# Altium PCB mc_psu_v2.PcbDoc
Units mm, origin at the board's own origin, x right, y up, seen from the top; angles counter-clockwise.
Board outline 90 x 82 mm, 2 copper layers (Top, Bottom); 73 components, 30 nets, 239 pads, 118 vias.
Unrouted connection lines stored in the file: 3.
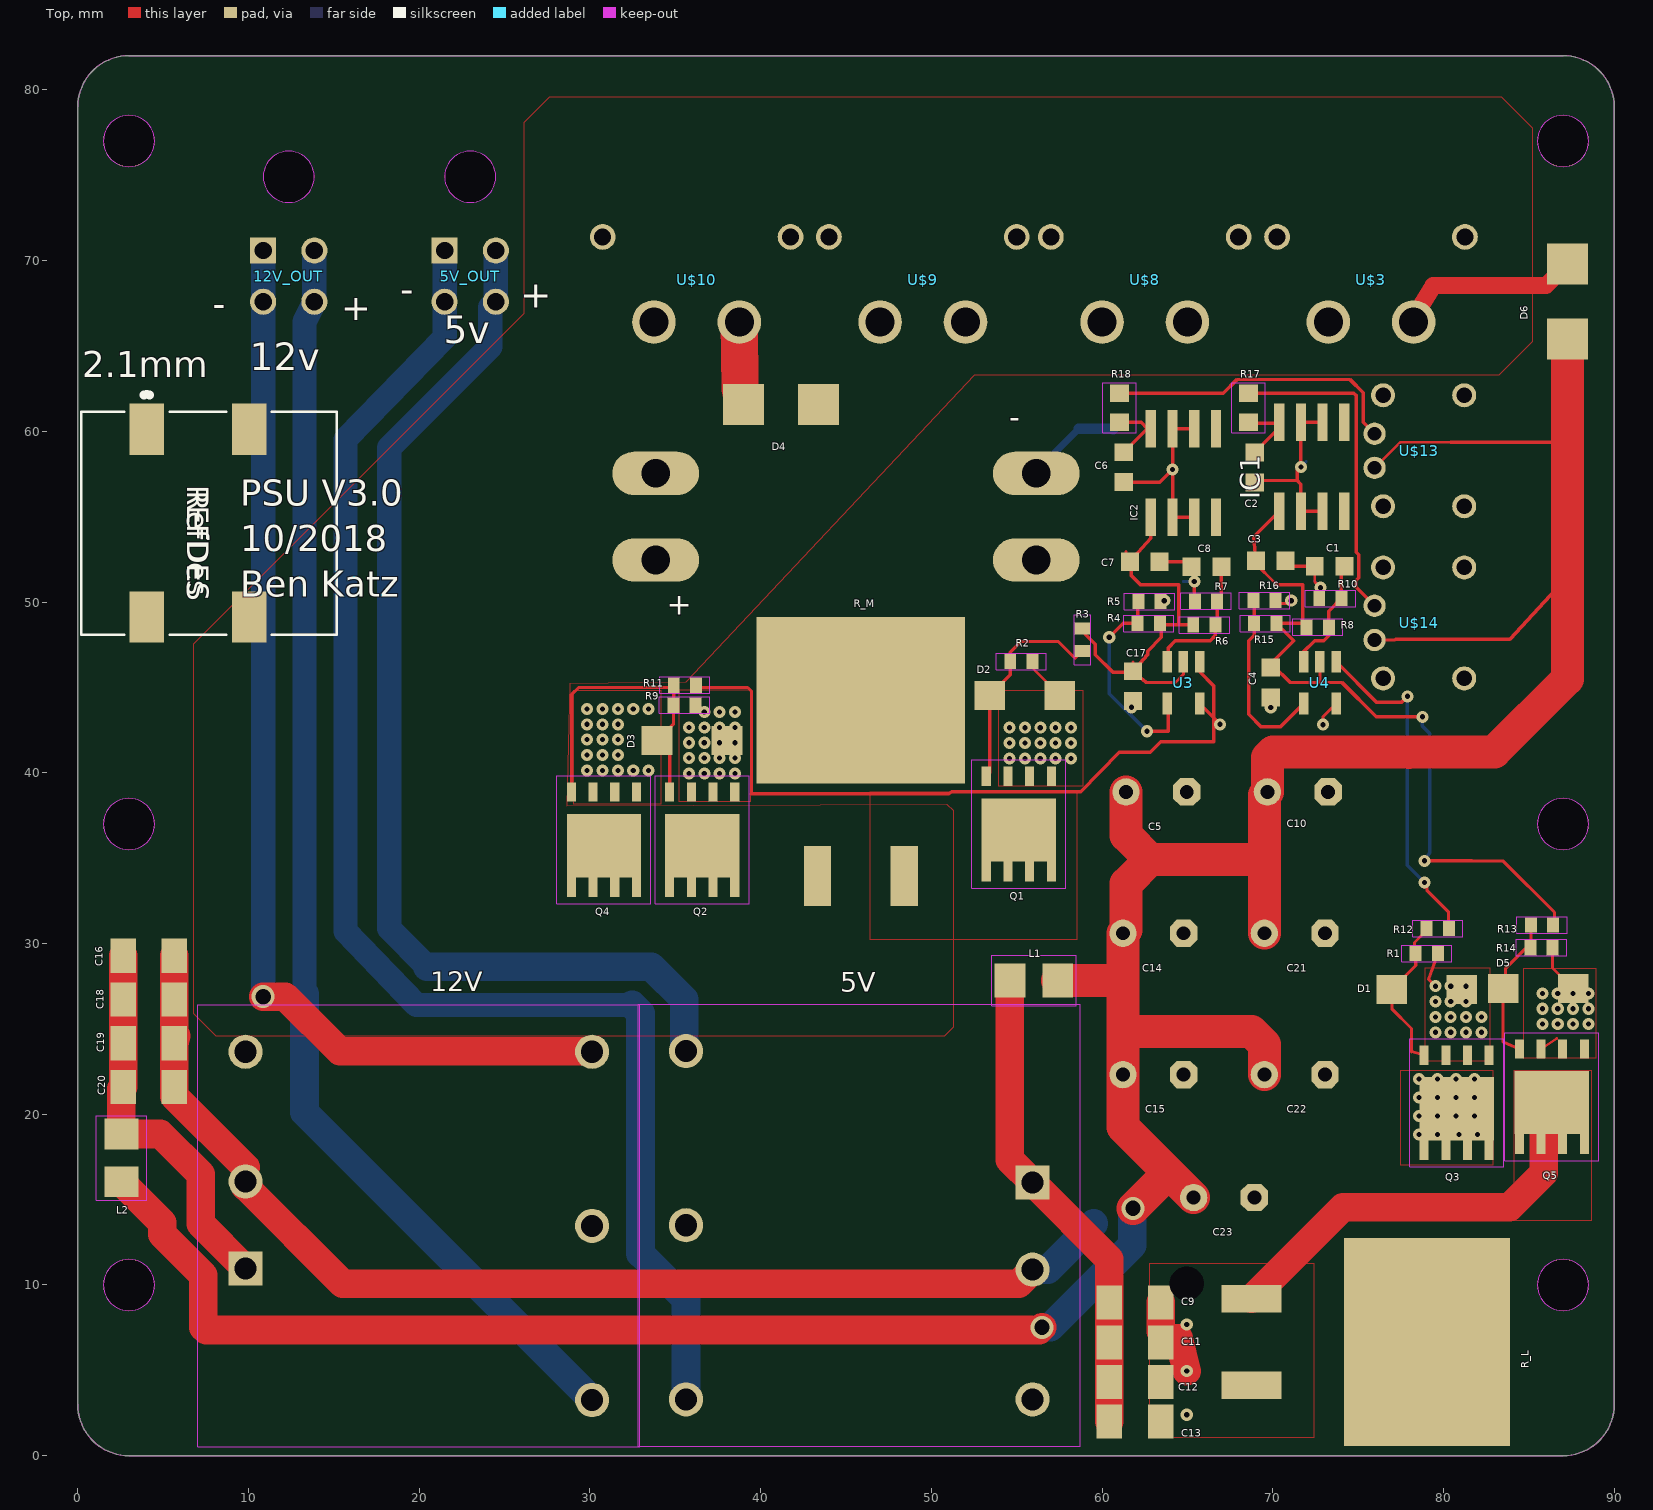
[diagram p0: Top view]
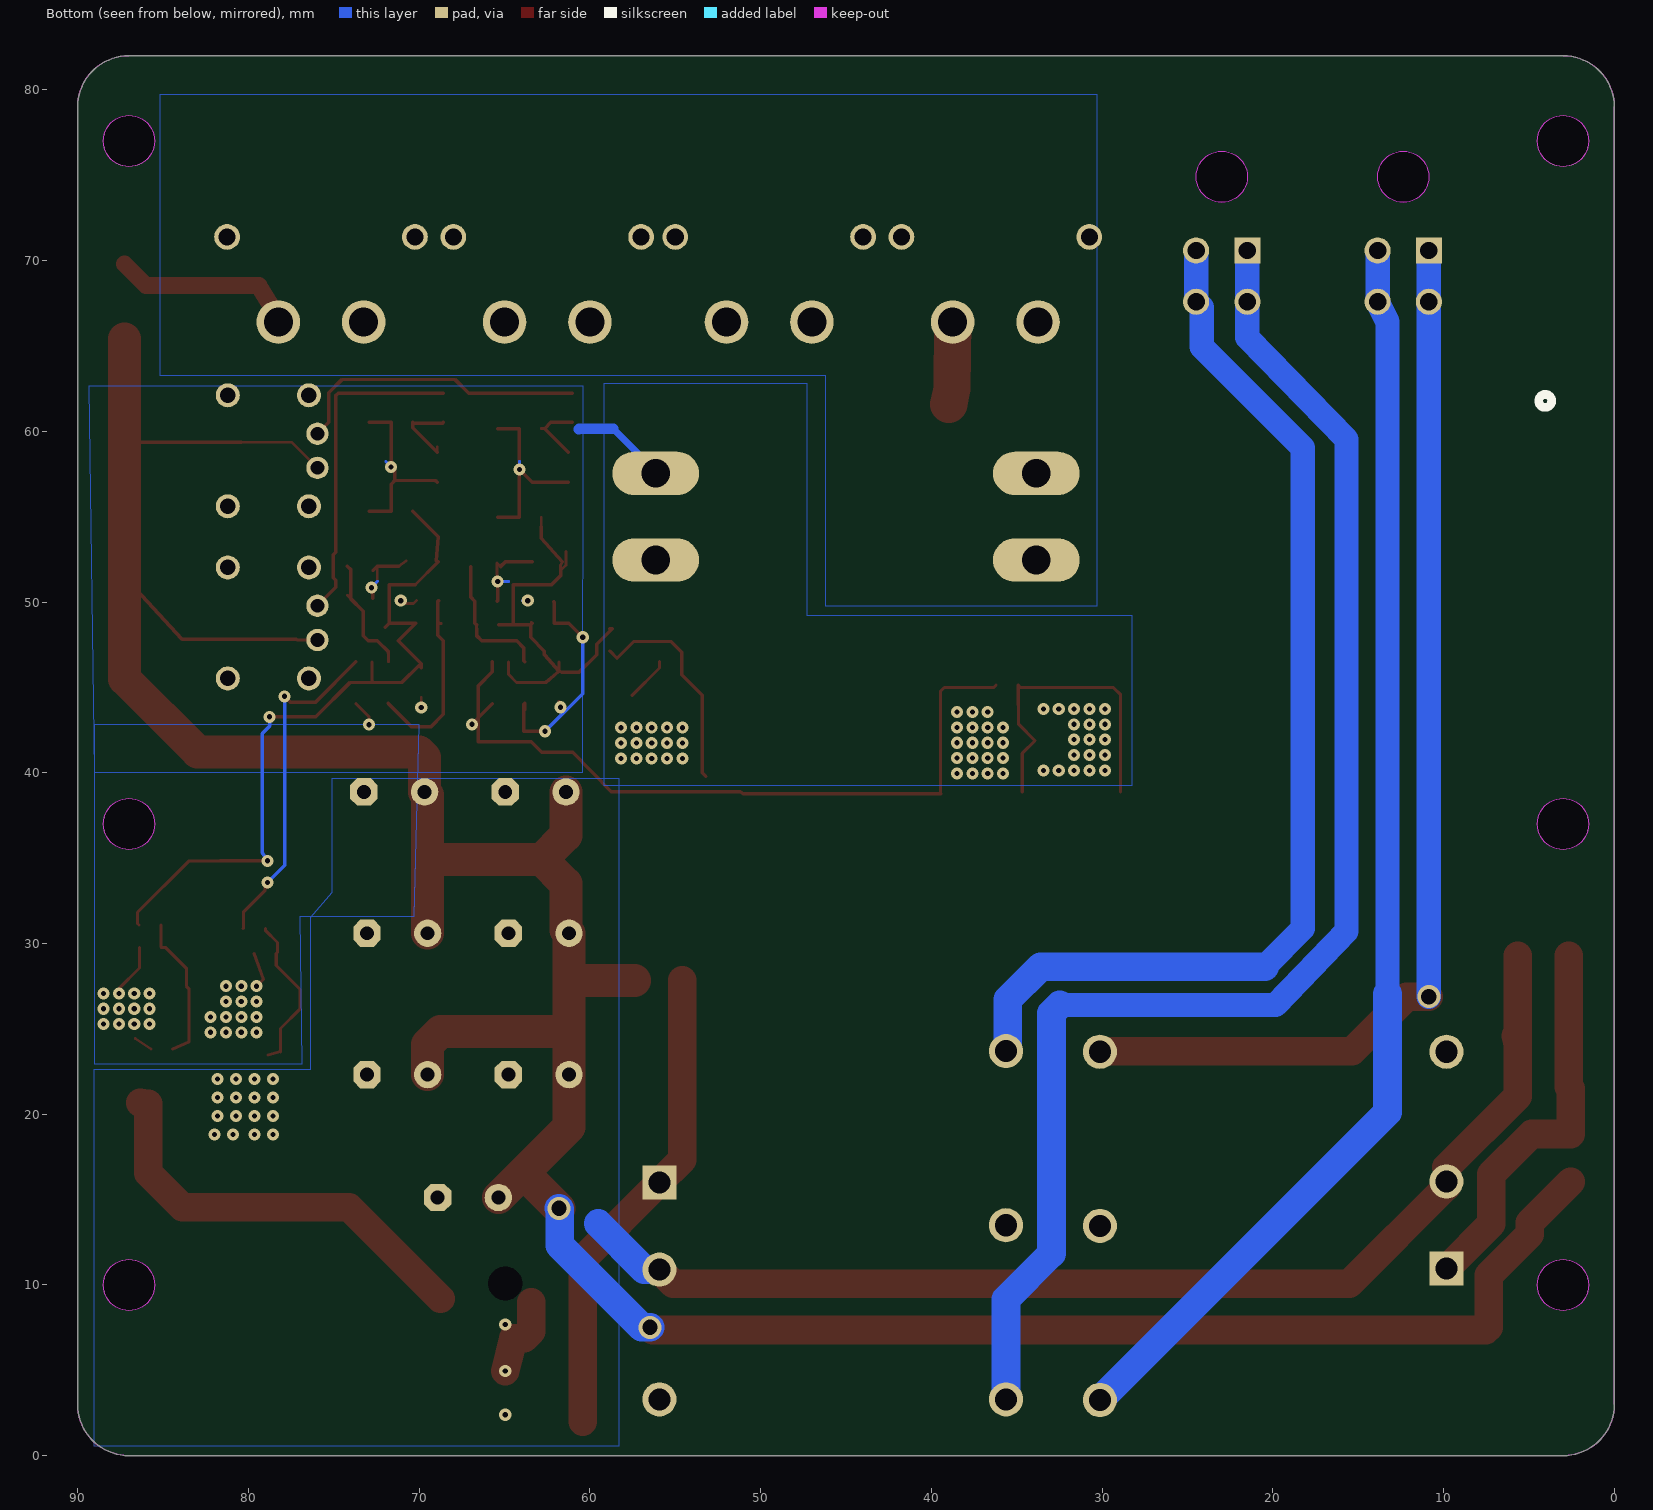
[diagram p1: Bottom view, seen from below]

## Layer stack, top to bottom
Top Solder: solder mask 0.0102, Solder Resist, Dk 3.5
Top: signal copper 0.035
Dielectric 1: dielectric 0.32, FR-4, Dk 4.8
Bottom: signal copper 0.035
Bottom Solder: solder mask 0.0102, Solder Resist, Dk 3.5

## Board outline
90,3 90,79 ccw(c87,79) 87,82 3,82 ccw(c3,79) 0,79 0,3 ccw(c3,3) 3,0 87,0 ccw(c87,3)
cut-out: 87,75.5 ccw(c87,77) 88.5,77 ccw(c87,77) 87,78.5 ccw(c87,77) 85.5,77 ccw(c87,77)
cut-out: 3,75.5 ccw(c3,77) 4.5,77 ccw(c3,77) 3,78.5 ccw(c3,77) 1.5,77 ccw(c3,77)
cut-out: 22.99,73.41 ccw(c22.99,74.91) 24.49,74.91 ccw(c22.99,74.91) 22.99,76.41 ccw(c22.99,74.91) 21.49,74.91 ccw(c22.99,74.91)
cut-out: 12.36,73.41 ccw(c12.36,74.91) 13.86,74.91 ccw(c12.36,74.91) 12.36,76.41 ccw(c12.36,74.91) 10.86,74.91 ccw(c12.36,74.91)
cut-out: 87,8.5 ccw(c87,10) 88.5,10 ccw(c87,10) 87,11.5 ccw(c87,10) 85.5,10 ccw(c87,10)
cut-out: 3,8.5 ccw(c3,10) 4.5,10 ccw(c3,10) 3,11.5 ccw(c3,10) 1.5,10 ccw(c3,10)
cut-out: 3,35.5 ccw(c3,37) 4.5,37 ccw(c3,37) 3,38.5 ccw(c3,37) 1.5,37 ccw(c3,37)
cut-out: 87,35.5 ccw(c87,37) 88.5,37 ccw(c87,37) 87,38.5 ccw(c87,37) 85.5,37 ccw(c87,37)

## Design rules (kind name [scope] priority, off if disabled: settings)
BoardOutlineClearance mdCopperDimension [All] p1: gap=0.254 ignorepadtopadclearanceinfootprint=FALSE except(0: Arc-SplitContinuation Track-SplitContinuation SMDPad-SplitContinuation THPad-SplitContinuation Via-SplitContinuation Fill-SplitContinuation Poly-SplitContinuation Region-SplitContinuation Text-SplitContinuation; 1.016: Poly-OutlineEdge Poly-CavityEdge Poly-CutoutEdge Poly-SplitBarrior)
Clearance Clearance_for_PolygonClass_Isolate_24 [InPolygonClass('Isolate_24') vs IsArc Or IsTrack Or IsPad Or IsVia Or IsFill Or IsRegion Or IsText] p1: gap=0.61 ignorepadtopadclearanceinfootprint=FALSE
Clearance Clearance_for_PolygonClass_Isolate_16 [InPolygonClass('Isolate_16') vs IsArc Or IsTrack Or IsPad Or IsVia Or IsFill Or IsRegion Or IsText] p2: gap=0.406 ignorepadtopadclearanceinfootprint=FALSE
Clearance Clearance_for_PolygonClass_Isolate_12 [InPolygonClass('Isolate_12') vs IsArc Or IsTrack Or IsPad Or IsVia Or IsFill Or IsRegion Or IsText] p3: gap=0.305 ignorepadtopadclearanceinfootprint=FALSE
Clearance Clearance_for_PolygonClass_Isolate_10 [InPolygonClass('Isolate_10') vs IsArc Or IsTrack Or IsPad Or IsVia Or IsFill Or IsRegion Or IsText] p4: gap=0.254 ignorepadtopadclearanceinfootprint=FALSE
Clearance "Clearance (Same Net)" [All] p5: gap=0.203 ignorepadtopadclearanceinfootprint=FALSE
Clearance [All] p6: gap=0.203 ignorepadtopadclearanceinfootprint=FALSE
HoleSize [All] p1: absolutevalues=TRUE maxlimit=2540 minlimit=0.3 maxpercent=80.000 minpercent=20.000
HoleToHoleClearance mdDrill [All] p1: gap=0.203 allowstackedmicrovias=TRUE
MinimumSolderMaskSliver [All] p1 off: minsoldermaskwidth=0.254
PasteMaskExpansion Expansion_SMDPaste_OFF [InPadClass('SMDPaste_OFF')] p1: expansion=0
PasteMaskExpansion mlMinCreamFrame [All] p2: expansion=0
PolygonConnect PolygonConnect_For_PolygonThermal_OFF [InPolygonClass('PolygonThermal_OFF')] p1: connectstyle=Direct reliefconductorwidth=0.254 reliefentries=4 polygonreliefangle="90 Angle" airgapwidth=0.254
PolygonConnect ThermalVias [IsVia] p2: connectstyle=Direct reliefconductorwidth=0.254 reliefentries=4 polygonreliefangle="90 Angle" airgapwidth=0.254
PolygonConnect [All] p3: connectstyle=Relief reliefconductorwidth=0.254 reliefentries=4 polygonreliefangle="90 Angle" airgapwidth=0.254
RoutingVias [All] p1: holewidth=0.3 width=0.706 viastyle="Through Hole" minholewidth=0.3 minwidth=0.706 maxholewidth=2.54 maxwidth=2.54
SolderMaskExpansion mlMinStopFrame [All] p1: expansion=0.102 istentingtop=FALSE
Width [All] p1: maxlimit=0.254 minlimit=0.203 preferedwidth=0.203
26 further rules are at their usual default settings.

## Classes and differential pairs
polygon class PolygonThermal_OFF: Polygon_1_Net_BAT+ Polygon_1_Net_BAT- Polygon_1_Net_LP_N Polygon_1_Net_M- Polygon_1_Net_N$1 Polygon_1_Net_N$13 Polygon_2_Net_BAT- Polygon_2_Net_LP_N Polygon_3_Net_BAT- Polygon_3_Net_LP_N Polygon_4_Net_BAT- Polygon_5_Net_BAT- Polygon_6_Net_BAT- Polygon_7_Net_BAT- Polygon_8_Net_BAT-
polygon class Isolate_24: Polygon_1_Net_LP_N Polygon_2_Net_LP_N Polygon_7_Net_BAT- Polygon_8_Net_BAT-
polygon class Isolate_16: Polygon_1_Net_M- Polygon_1_Net_N$1
polygon class Isolate_12: Polygon_6_Net_BAT-
polygon class Isolate_10: Polygon_1_Net_BAT+ Polygon_1_Net_BAT- Polygon_1_Net_N$13 Polygon_2_Net_BAT- Polygon_3_Net_BAT- Polygon_3_Net_LP_N Polygon_4_Net_BAT- Polygon_5_Net_BAT-
pad class SMDPaste_OFF: Q1-EP Q2-EP Q3-EP Q4-EP Q5-EP

## Components (designator, comment, footprint, x,y, rotation, side; value= is the part's Value field where it differs from the comment)
2.1mm "FC68148S" FC68148S_CLF 7.691,54.62 r270 top
5V "5v" CONV_PDQ30-Q24-S5-D 45.78,13.5 r270 top
5V_OUT "HEADER_POS4_?43045-0401" 43045-0400 22.99,74.91 r180 top
12V "12V" CONV_PDQ30-Q24-S5-D 19.98,13.46 r90 top
12V_OUT "HEADER_POS4_?43045-0401" 43045-0400 12.36,74.91 r180 top
+ "QFIT" FASTON 33.85,55 r90 top
- "QFIT" FASTON 56.15,55 r270 top
C1 "10uF" C0603K 73.33,52.1 r180 top
C2 "1uF" C0603K 68.94,57.89 r270 top
C3 "10uF" C0603K 69.88,52.42 r0 top
C4 ".1uF" C0603K 69.88,45.28 r270 top
C5 "220uF" E3,5-8 63.18,38.88 r0 top
C6 "1uF" C0603K 61.27,57.9 r270 top
C7 "10uF" C0603K 62.5,52.37 r0 top
C8 "10uF" C0603K 66.11,52.08 r180 top
C9 "10uF" C1206K 61.93,8.98 r0 top
C10 "220uF" E3,5-8 71.46,38.88 r0 top
C11 "10uF" C1206K 61.93,6.64 r0 top
C12 "10uF" C1206K 61.93,4.32 r0 top
C13 "10uF" C1206K 61.93,2 r0 top
C14 "220uF" E3,5-8 63,30.6 r0 top
C15 "220uF" E3,5-8 63,22.32 r0 top
C16 "10uF" C1206K 4.16,29.28 r0 top
C17 ".1uF" C0603K 61.81,45.07 r270 top
C18 "10uF" C1206K 4.16,26.72 r0 top
C19 "10uF" C1206K 4.16,24.16 r0 top
C20 "10uF" C1206K 4.16,21.6 r0 top
C21 "220uF" E3,5-8 71.28,30.6 r0 top
C22 "220uF" E3,5-8 71.28,22.32 r0 top
C23 "220uF" E3,5-8 67.14,15.12 r0 top
D1 "tvs" DO214AC 79.02,27.31 r0 top
D2 "tvs" DO214AC 55.47,44.54 r0 top
D3 "tvs" DO214AC 35.98,41.88 r0 top
D4 "DIODE-SMB" SMB 41.19,61.58 r0 top
D5 "tvs" DO214AC 85.54,27.356 r0 top
D6 "MBRS130LT3" SMB 87.26,67.6 r90 top
IC1 "78L*SMD" SO08 72.28,57.92 r0 top
IC2 "78L*SMD" SO08 64.76,57.56 r0 top
L1 "470nH" L3225P 56,27.84 r0 top
L2 "470nH" L3225P 2.56,17.44 r270 top
Q1 "N-FETPOWER_SO8" TRANS_TPH5900CNH,L1Q 55.12,37 r270 top
Q2 "N-FETPOWER_SO8" TRANS_TPH5900CNH,L1Q 36.58,36.08 r270 top
Q3 "N-FETPOWER_SO8" TRANS_TPH5900CNH,L1Q 80.768,20.668 r270 top
Q4 "N-FETPOWER_SO8" TRANS_TPH5900CNH,L1Q 30.82,36.08 r270 top
Q5 "N-FETPOWER_SO8" TRANS_TPH5900CNH,L1Q 86.344,21.03 r270 top
R1 "10k" R0402 79.02,29.42 r180 top
R2 "10k" R0402 55.27,46.52 r180 top
R3 "100" R0402 58.84,47.79 r90 top
R4 "10k" R0402 62.73,48.75 r0 top
R5 "10k" R0402 62.77,50.03 r180 top
R6 "10k" R0402 65.99,48.66 r0 top
R7 "20k" R0402 66.09,50.05 r0 top
R8 "10k" R0402 72.63,48.53 r0 top
R9 "10k" R0402 35.54,43.96 r180 top
R10 "20k" R0402 73.37,50.21 r0 top
R11 "100" R0402 35.56,45.13 r0 top
R12 "100" R0402 79.66,30.88 r0 top
R13 "100" R0402 85.764,31.084 r0 top
R14 "10k" R0402 85.734,29.758 r180 top
R15 "10k" R0402 69.56,48.75 r0 top
R16 "10k" R0402 69.51,50.09 r180 top
R17 "51" R0603 68.58,61.38 r90 top
R18 "51" R0603 61.02,61.38 r90 top
R_L "2" D2PAK 79.03,6.66 r270 top
R_M "2" D2PAK 45.87,44.24 r0 top
U3 "LMC7211BIM5/NOPB" MF05A 64.76,45.28 r270 top
U4 "LMC7211BIM5/NOPB" MF05A 72.76,45.28 r270 top
U$3 "XT30FEMALW" XT30_H_F 75.75,66.25 r0 top
U$8 "XT30FEMALW" XT30_H_F 62.5,66.25 r0 top
U$9 "XT30FEMALW" XT30_H_F 49.5,66.25 r0 top
U$10 "XT30FEMALW" XT30_H_F 36.25,66.25 r0 top
U$13 "2-PINM80_H" M80-840242 75.96,58.86 r90 top
U$14 "2-PINM80_H" M80-840242 75.96,48.78 r90 top

## Footprints (in the part's own frame and the unit in brackets; to place one, negate y for a bottom-side part, rotate by r counter-clockwise, add the part's x,y. Pads: shape width x height; smd on the part's side, far side on the other; paste and mask are expansions set on the pad)
43045-0400 [mm] "43045-0400"
  rect 1.53x1.53 / inner round 1.414 / far side rect 1.53x1.53 hole 1.02: P$1(1.5,4.32)
  round 1.53 hole 1.02: P$2(-1.5,4.32) P$3(1.5,7.32) P$4(-1.5,7.32)
C0603K [mm] "C0603K"
  rect 1.05x1.08 smd: 1(-0.875,0) 2(0.875,0)
C1206K [mm] "C1206K"
  rect 1.5x2 smd: 1(-1.5,0) 2(1.5,0)
CONV_PDQ30-Q24-S5-D [mm] "CONV_PDQ30-Q24-S5-D"
  rect 2x2 / inner round 1.848 / far side rect 2x2 hole 1.3: 1(-2.5,10.15)
  round 2 hole 1.3: 2(2.6,10.15) 3(-10.2,-10.15) 4(0,-10.15) 5(10.2,-10.15) 6(10.2,10.15)
  Top keep-out lines w0.05: 12.95,-12.95 -12.95,-12.95 -12.95,12.95 12.95,12.95 12.95,-12.95
D2PAK [mm] "D2PAK"
  rect 1.6x3.5 smd: 1(-2.54,-10.28) 3(2.54,-10.28)
  rect 12.2x9.75 smd: 2(0,0)
DO214AC [mm] "DO214AC"
  rect 1.8x1.7 smd: A(2.05,0) C(-2.05,0)
E3,5-8 [mil] "E3,5-8"
  round 63 hole 32: +(-70,0)
  oct 63x63 / inner round 58.2 / far side oct 63x63 hole 32: -(70,0)
FASTON [mil] "FASTON"
  oval 100x200 hole 66: 1(-100,0) 2(100,0)
FC68148S_CLF [mil]
  rect 118x79 smd paste+0 mask+0: 1(-216.54,-143.57) 2(-216.54,92.65) 3(216.54,-143.57) 4(216.54,92.65)
  silkscreen extent -297,-295 257,295, body extent -250,-290 250,295, height 429
L3225P [mm] "L3225P"
  rect 1.8x2 smd: 1(-1.4,0) 2(1.4,0)
  Top keep-out lines w0.051: -2.473,-1.483 -2.473,1.483 2.473,1.483 2.473,-1.483 -2.473,-1.483
M80-840242 [mil] "M80-840242"
  round 51.5 hole 31.5: 1(39.37,0) 2(-39.37,0)
  round 55.43 hole 35.43: P$4(127.95,-19.69) P$5(-127.95,-19.69) P$6(-127.95,-206.69) P$7(127.95,-206.69)
MF05A [mil] "MF05A"
  rect 50x22 smd: 1(-48,37.5) 2(-48,0) 3(-48,-37.5) 4(48,-37.5) 5(48,37.5)
R0402 [mm] "R0402"
  rect 0.7x0.9 smd: 1(-0.65,0) 2(0.65,0)
  Top keep-out lines w0.051: 1.473,0.483 1.473,-0.483 -1.473,-0.483 -1.473,0.483 1.473,0.483
R0603 [mm] "R0603"
  rect 1x1.1 smd: 1(-0.85,0) 2(0.85,0)
  Top keep-out lines w0.051: -1.473,0.983 -1.473,-0.983 1.473,-0.983 1.473,0.983 -1.473,0.983
SMB [mm] "SMB"
  rect 2.4x2.4 smd: A(2.2,0) C(-2.2,0)
SO08 [mm] "SO08"
  rect 0.6x2.2 smd: 1(-1.905,-2.6) 2(-0.635,-2.6) 3(0.635,-2.6) 4(1.905,-2.6) 5(1.905,2.6) 6(0.635,2.6) 7(-0.635,2.6) 8(-1.905,2.6)
TRANS_TPH5900CNH,L1Q [mm] "TRANS_TPH5900CNH,L1Q"
  rect 1.13x0.53 smd: 1(-2.79,1.905) 2(-2.79,0.635) 3(-2.79,-0.635) 4(-2.79,-1.905)
  rect 1.33x0.53 smd: 5(2.69,-1.905) 6(2.69,-0.635) 7(2.69,0.635) 8(2.69,1.905)
  rect 3.7x4.35 smd paste+0: EP(0.35,0)
  Top keep-out lines w0.05: 3.75,-2.75 3.75,2.75 -3.75,2.75 -3.75,-2.75 3.75,-2.75
XT30_H_F [mm] "XT30_H_F"
  round 2.55 hole 1.7: +(2.5,0.15) -(-2.5,0.15)
  round 1.508 hole 1: P$3(5.5,5.135) P$4(-5.5,5.135)

## Part data
2.1mm: "No Description Available", Manufacturer_Name=Cliff, Copyright="Copyright (C) 2025 Ultra Librarian. All rights reserved.", MANUFACTURER_PART_NUMBER=FC68148S, RefDes=RefDes, Type=Type
5V 12V: library part PDQ30-Q24-S5-D, "12 Vdc, 2.5 A, 30 W, 9 ~ 36 Vdc", PACKAGE="DIP-6 CUI", CUI_PURCHASE_URL=https://www.cui.com/product/power/dc-dc-converters/isolated/pdq30-d-series?utm_source=snapeda.com&utm_medium=referral&utm_campaign=snapedaBOM, DeviceSetName=PDQ30-Q24-S5-D, DIGI-KEY_PART_NUMBER=102-3891-ND, DIGI-KEY_PURCHASE_URL=https://www.digikey.com/product-detail/en/cui-inc/PDQ30-Q24-S5-D/102-3891-ND/6165424?utm_source=snapeda&utm_medium=aggregator&utm_campaign=symbol, GateName_1=G$1, LibraryName=PDQ30-Q24-S5-D, MF=CUI, MP=PDQ30-Q24-S5-D, SymbolName_1=PDQ30-Q24-S5-D
5V_OUT 12V_OUT: "Molex - Micro-Fit 3.0 Series connector,  3.00mm (0.118\") pitch header, 4 positions.", DeviceName=43045-0401, DeviceSetName=HEADER_POS4_?, GateName_1=G$1, LibraryName=con-molex-micro-fit-3_0, MATERIAL=MATERIAL, SymbolName_1=HEADER_POS4
+ -: "QUICKFIT PCB TERMINAL", DeviceSetName=QFIT, GateName_1=G$1, LibraryName=keystone, SymbolName_1=QFIT-2
C1 C2 C3 C4 C6 C7 C8 C17: library part C-USC0603K, "CAPACITOR, American symbol", DeviceName=C0603K, DeviceSetName=C-US, GateName_1=G$1, LibraryName=rcl, SymbolName_1=C-US
C5 C10 C14 C15 C21 C22 C23: library part CPOL-USE3.5-8, "POLARIZED CAPACITOR, American symbol", DeviceName=E3.5-8, DeviceSetName=CPOL-US, GateName_1=G$1, LibraryName=rcl, SymbolName_1=CPOL-US
C9 C11 C12 C13 C16 C18 C19 C20: library part C-USC1206K, "CAPACITOR, American symbol", DeviceName=C1206K, DeviceSetName=C-US, GateName_1=G$1, LibraryName=rcl, SymbolName_1=C-US
D1 D2 D3 D5: library part DIODE-DO214AC, "DIODE", DeviceName=DO214AC, DeviceSetName=DIODE-, GateName_1=G$1, LibraryName=diode, SymbolName_1=D
D4: "DIODE", DeviceName=SMB, DeviceSetName=DIODE-, GateName_1=G$1, LibraryName=diode, SymbolName_1=D
D6: "Schottky Power Rectifier   Source: http://www.onsemi.com/pub/Collateral/MBRS130LT3-D.PDF", DeviceSetName=MBRS130LT3, GateName_1=G$1, LibraryName=diode, SymbolName_1=SCHOTTKY
IC1 IC2: "Positive VOLTAGE REGULATOR", DeviceSetName=78L*SMD, GateName_1=G$1, GND=GND, LibraryName=linear, SymbolName_1=LM78LXX
L1 L2: library part L-USL3225P, "INDUCTOR, American symbol", DeviceName=L3225P, DeviceSetName=L-US, GateName_1=G$1, LibraryName=rcl, SymbolName_1=L-US
Q1 Q2 Q3 Q4 Q5: "N-CHANNEL MOS FET SYMBOL", DeviceName=POWER_SO8, DeviceSetName=N-FET, GateName_1=G$1, LibraryName=Ben_Library, SymbolName_1=MFN-D
R1 R2 R3 R4 R5 R6 R7 R8 R9 R10 R11 R12 R13 R14 R15 R16: library part R-US_R0402, "RESISTOR, American symbol", DeviceName=R0402, DeviceSetName=R-US_, GateName_1=G$1, LibraryName=rcl, SymbolName_1=R-US
R17 R18: library part R-US_R0603, "RESISTOR, American symbol", DeviceName=R0603, DeviceSetName=R-US_, GateName_1=G$1, LibraryName=rcl, SymbolName_1=R-US
R_L R_M: library part RESISTOR, DeviceSetName=RESISTOR, GateName_1=G$1, LibraryName=BenLibrary, SymbolName_1=R-US
U3 U4: MANUFACTURER_PART_NUMBER=LMC7211BIM5NOPB, DeviceSetName=LMC7211BIM5/NOPB, GateName_1=A, LibraryName=lmc7211, SymbolName_1=LMC7211BIM5/NOPB, VENDOR="Texas Instruments"
U$3 U$8 U$9 U$10: DeviceName=FEMALW, DeviceSetName=XT30, GateName_1=G$1, LibraryName=Ben_Library, SymbolName_1=XT30
U$13 U$14: DeviceName=M80_H, DeviceSetName=2-PIN, GateName_1=G$1, LibraryName=Ben_Library, SymbolName_1=2-PIN

## Free pads (board coordinates)
  round 3 hole 3 unplated: MH1(3,10) MH1(12.36,74.91) MH1(22.99,74.91) MH2(87,10) MH3(87,37) MH4(3,37) MH5(3,77) MH6(87,77)

## Via types
v1: diameter 0.706/0.706 (per signal layer), hole 0.3, Top to Bottom, 114 vias
v2: diameter 1.35/1.35 (per signal layer), hole 0.9, Top to Bottom, 3 vias
v3: diameter 0.706/0.706 (per signal layer), hole 2, Top to Bottom, 1 vias

## Nets (pads, with @x,y where several pads share a name; then routed paths per layer and width w, separated by ;. In a path a pad name is that pad's centre, name@x,y a point inside that pad or via, vN(x,y) a via of type N, cw(c..) or ccw(c..) an arc to the next point about the centre after c; other vN are vias at no path point)
5V_GND: 5V.5 5V_OUT.P$1 5V_OUT.P$3 | length 85.3
  Bottom w1.422: 5V_OUT.P$1 5V_OUT.P$3 21.49,65.49 15.68,59.52 15.68,30.72 19.84,26.4 32.47,26.4
  Bottom w1.676: 32.47,26.4 32.96,25.91 32.96,11.84 35.63,9.17 5V.5
5V_OUT: 5V.3 5V_OUT.P$2 5V_OUT.P$4 | length 64.4
  Bottom w1.422: 20.48,28.64 18.24,30.88 18.24,59.04 24.16,64.96 24.16,67.26 5V_OUT.P$4 5V_OUT.P$2
  Bottom w1.676: 20.48,28.64 33.6,28.64 35.52,26.72 35.52,23.81 5V.3
12_GND: 2.1mm.1 12V.5 12V_OUT.P$1 12V_OUT.P$3 | length 64.3
  Top w1.676: v2(10.86,26.89) 12.15,26.89 15.36,23.68 30.11,23.68 12V.5
  Bottom w1.422: v2(10.86,26.89) 12V_OUT.P$3 12V_OUT.P$1
12_OUT: 2.1mm.4 12V.3 12V_OUT.P$2 12V_OUT.P$4 | length 74.4
  Bottom w1.422: 13.28,27.04 13.28,66.41 12V_OUT.P$4 12V_OUT.P$2
  Bottom w1.676: 13.28,27.04 13.28,20.11 12V.3
12V: C7.1 C17.1 IC2.1 R3.2 R4.2 R6.1 U3.2 | length 25.3
  Top w0.16: 61.4,52.96 61.4,52.16 61.72,51.84 61.72,52.15 C7.1 ; C17.1 61.81,46.49 ; IC2.1@62.855,54.415 IC2.1 ; R4.2 R4.2@63.43,48.8 ; R4.2@63.47,48.66 R4.2@63.48,48.65
  Top w0.18: 62.592,45.288 64.296,45.288 64.76,45.752 U3.2
  Top w0.204: R3.2 58.696,48.44 59.604,47.532 59.604,46.92 60.624,45.9 61.64,45.9 C17.1 ; C7.1 62.855,53.725 IC2.1@62.855,54.415 ; C7.1@61.72,51.84 61.72,51.536 62.256,51 64.5,51 64.5,48.66 ; 62.592,45.288 C17.1 ; R4.2 R4.2@63.47,48.66 ; R6.1 64.5,48.66 ; C17.1 62.664,46.924 62.664,47.124 63.47,47.93 R4.2@63.47,48.66 ; R4.2@63.47,48.66 64.5,48.66
12V1: C3.1 C4.1 IC1.1 R8.1 R13.2 R15.2 U4.2 | length 44.6
  Top w0.16: C3.1@68.88,52.36 C3.1 ; R15.2 R15.2@70.25,48.71
  Top w0.18: C3.1@68.88,52.36 70.24,51 ; 72.66,45.288 72.76,45.388 U4.2 ; 81.646,34.844 83.476,34.844 86.496,31.824 86.496,31.166 R13.2
  Top w0.203: 73.824,45.288 74.052,45.288 76.06,43.28 v1(78.76,43.28)
  Top w0.204: C3.1 68.88,53.825 IC1.1 ; 70.24,51 71.76,51 R8.1@71.76,48.75 ; R8.1 R8.1@71.76,48.75 ; 73.824,45.288 72.66,45.288 71.028,45.288 70.036,46.28 C4.1 69.88,46.384 71.228,47.732 R15.2 R8.1@71.76,48.75 ; v1(78.88,34.844) 81.646,34.844
  Bottom w0.204: v1(78.76,43.28) 78.76,42.74 79.2,42.3 79.2,35.344 v1(78.88,34.844)
B2_FILT: 12V.1 C16.1 C18.1 C19.1 C20.1 L2.1 | length 22.7
  Top w1.676: C16.1 C18.1 C19.1 C20.1 2.56,21.5 L2.1 4.84,18.84 7.2,16.48 7.2,13.59 12V.1
B_FILT: 5V.1 C9.1 C11.1 C12.1 C13.1 L1.1 | length 28.3
  Top w1.676: L1.1 54.6,17.33 5V.1 60.43,11.5 C9.1 C11.1 C12.1 C13.1
BAT+: +.1 +.2 D4.C D6.A U$3.+ U$8.+ U$9.+ U$10.+ | length 15.7
  Top w1.016: U$3.+ 78.25,66.633 79.4,68.54 86,68.54 D6.A
  Top w2.184: U$10.+ 38.79,62.5 D4.C
BAT+_L: C5.+ C10.+ C14.+ C15.+ C21.+ C22.+ C23.+ D6.C L1.2 L2.2 U$13.2 U$14.2 | length 195.6
  Top w0.16: U$14.2 77.16,47.78 77.212,47.832 ; U$13.2 77.458,59.358 80.428,59.358
  Top w0.204: 77.212,47.832 83.888,47.832 87.26,51.48 ; 80.428,59.358 87.038,59.358 87.26,59.58 ; 87.26,51.84 87.37,51.73 87.37,51.618 87.364,51.612
  Top w1.422: D6.C@87.04,64.96 87.12,65.04 D6.C
  Top w1.676: L2.2 4.96,13.64 4.96,12.96 7.36,10.56 7.36,7.52 7.52,7.36 56.32,7.36 v2(56.48,7.52)
  Top w1.93: L1.2 60.802,27.84 61.222,28.26 ; C5.+ 61.402,36.338 62.82,34.92 ; v2(61.812,14.484) 61.824,14.484 63.911,16.571 ; C23.+ 63.911,16.571 ; C22.+ 69.502,24.098 68.76,24.84 61.402,24.84 61.222,25.02 ; C21.+ 69.502,35.1 ; 77.962,41.198 77.94,41.22 ; D6.C 87.26,59.58 87.26,51.84 87.26,51.48 87.26,45.5 82.98,41.22 77.94,41.22 ; 61.222,25.02 C15.+ 61.222,19.26 63.911,16.571 ; 61.222,25.02 61.222,28.26 ; 61.222,28.26 C14.+ 61.402,30.78 61.402,33.502 62.82,34.92 ; 62.82,34.92 69.322,34.92 69.502,35.1 ; 69.502,35.1 69.502,38.7 C10.+ 69.682,40.882 70.02,41.22 77.94,41.22
  Bottom w1.676: v2(56.48,7.52) 56.96,7.52 61.76,12.32 61.76,14.432 v2(61.812,14.484)
BAT-: -.1 -.2 C1.2 C2.2 C3.2 C4.2 C6.2 C7.2 C8.2 C17.2 D1.A D2.A D5.A IC1.2 IC1.3 IC1.6 IC1.7 IC2.2 IC2.3 IC2.6 IC2.7 R1.1 R2.1 R5.1 R7.1 R10.1 R14.1 R16.1 U3.5 U4.5 | length 52.4
  Top w0.16: v1(61.72,43.84) 61.81,43.93 C17.2 ; R5.1 63.59,50.03 v1(63.64,50.08) ; C8.2 65.44,52.283 v1@65.44,51.088 ; v1(69.88,43.82) C4.2 ; R16.1 70.34,49.91 71.25,49.91 v1(71.08,50.08) ; C3.2 C3.2@71.2,52.1 ; IC1.2@71.64,55.325 IC1.2 ; IC1.2@71.64,56.32 IC1.2@71.645,56.325 ; C1.2@72.72,51.835 C1.2 72.455,51.185 v1(72.8,50.84)
  Top w0.18: R2.1 55.92,46.14 D2.A ; U3.5 65.713,44.04 v1(66.912,42.84) ; v1(72.936,42.816) 72.936,43.284 U4.5 ; v1(79.52,27.5) 79.13,27.89 R1.1 ; R14.1 86.384,28.562 D5.A
  Top w0.204: C6.2 63.385,57.025 v1(64.12,57.76) ; C7.2 64.945,52.37 C8.2 ; IC2.3 IC2.2 64.125,57.755 v1(64.12,57.76) ; IC2.6 IC2.7 64.125,57.765 v1(64.12,57.76) ; v1(65.4,51.2) 65.4,50.09 R7.1 ; C2.2 69.045,57.12 71.436,57.12 ; C3.2@71.2,52.1 C1.2 ; R10.1 72.72,50.76 v1(72.8,50.84) ; IC1.3 IC1.2 71.645,56.325 71.645,56.911 71.436,57.12 ; IC1.6 IC1.7 71.64,60.515 v1(71.64,57.92) 71.436,57.716 71.436,57.12
  Bottom w0.16: v1@61.72,43.68 v1(61.72,43.84) ; v1(63.64,50.08) v1@63.96,50.08 ; v1(64.12,57.76) 64.12,58.24 ; 64.76,51.2 v1(65.4,51.2) ; v1@71.02,50.08 v1(71.08,50.08) ; v1(71.64,57.92) 71.96,58.24 ; 72.44,51.22 72.8,50.86 v1(72.8,50.84)
  Bottom w0.18: v1@66.708,42.84 v1(66.912,42.84)
  Bottom w0.406: -.1 56.15,57.67 58.64,60.16
  Bottom w0.61: 58.64,60.16 60.62,60.16 60.66,60.12
  other v1: 79.52,24.8 80.42,24.8 81.32,24.8 82.22,24.8 85.788,25.28 86.688,25.28 87.588,25.28 88.488,25.28 79.52,25.7 80.42,25.7 81.32,25.7 82.22,25.7 85.788,26.18 86.688,26.18 87.588,26.18 88.488,26.18 79.52,26.6 80.42,26.6 81.32,26.6 85.788,27.08 86.688,27.08 87.588,27.08 88.488,27.08 80.42,27.5 81.32,27.5 35.8,39.96 36.7,39.96 37.6,39.96 38.5,39.96 29.84,40.14 30.74,40.14 31.64,40.14 32.54,40.14 33.44,40.14 54.58,40.84 55.48,40.84 56.38,40.84 57.28,40.84 58.18,40.84 35.8,40.86 36.7,40.86 29.84,41.04 30.74,41.04 31.64,41.04 54.58,41.74 55.48,41.74 56.38,41.74 57.28,41.74 58.18,41.74 35.8,41.76 36.7,41.76 29.84,41.94 30.74,41.94 31.64,41.94 54.58,42.64 55.48,42.64 56.38,42.64 57.28,42.64 58.18,42.64 35.8,42.66 36.7,42.66 29.84,42.84 30.74,42.84 31.64,42.84 37.6,43.56 38.5,43.56 29.84,43.74 30.74,43.74 31.64,43.74 32.54,43.74 33.44,43.74
GATE_L: D1.C Q3.4 R1.2 R12.1 | length 9.4
  Top w0.18: Q3.4 78.12,23.661 78.12,25.02 76.97,26.17 D1.C 77.39,27.73 77.83,28.17 78.37,28.71 R1.2 78.3,29.49 78.3,30.06 79.01,30.77 R12.1
GATE_M: D3.C Q2.4 Q4.4 R9.2 R11.1 | length 18.9
  Top w0.18: Q4.4 28.915,44.575 29.34,45 34.78,45 R11.1 34.91,43.98 R9.2 34.89,42.84 D3.C 34.675,41.135 Q2.4
L_SWITCH-: C2.1 IC1.8 R17.1 | length 4.5
  Top w0.16: C2.1 C2.1@68.94,59.085
  Top w0.203: R17.1 68.63,60.48 IC1.8@70.375,60.48
  Top w0.204: C2.1 70.375,60.2 70.375,60.48 IC1.8
LP_N: 5V.2 12V.2 C5.- C9.2 C10.- C11.2 C12.2 C13.2 C14.- C15.- C16.2 C18.2 C19.2 C20.2 C21.- C22.- C23.- Q3.5 Q3.6 Q3.7 Q3.8 Q3.EP R_L.3 | length 73.2
  Top w1.676: C16.2 C19.2 ; C19.2@5.76,24.58 C19.2 ; 12V.2 9.83,15.77 15.52,10.08 55.11,10.08 5V.2 ; 12V.2@9.83,16.89 5.66,21.06 C20.2 C19.2 ; C9.2 63.43,7.29 63.84,6.88 64.48,6.88 v1(64.96,4.96)
  Bottom w1.676: 5V.2 56.82,10.9 59.52,13.6
  other v1: 64.96,2.4 64.96,7.68 78.572,18.816 79.652,18.816 80.912,18.816 81.992,18.816 78.572,19.896 79.652,19.896 80.732,19.896 81.812,19.896 78.572,20.976 79.652,20.976 80.732,20.976 81.812,20.976 78.572,22.056 79.652,22.056 80.732,22.056 81.812,22.056
  other v3: 64.96,10.08
M-: D4.A Q2.5 Q2.6 Q2.7 Q2.8 Q2.EP Q4.5 Q4.6 Q4.7 Q4.8 Q4.EP R_M.1 U$3.- U$8.- U$9.- U$10.-
M_SWITCH_-: C6.1 IC2.8 R18.1 | length 3.9
  Top w0.16: IC2.8@62.655,60.16 IC2.8
  Top w0.203: R18.1 62.285,60.53 IC2.8@62.655,60.16
  Top w0.204: C6.1 IC2.8@62.655,60.16
NetC1_1: C1.1 R8.2 R10.2 U4.3 | length 7.2
  Top w0.16: U4.3@71.8,47.04 71.8,46.507 U4.3 ; R8.2 R8.2@73.3,48.55 ; R10.2 R10.2@74.205,50.395
  Top w0.204: U4.3@71.8,47.04 71.8,47.08 72.456,47.736 72.994,47.736 73.28,48.022 R8.2 73.28,49.47 R10.2 74.02,51.915 C1.1
NetC8_1: C8.1 R6.2 R7.2 U3.3 | length 8.1
  Top w0.16: U3.3@63.8,46.507 U3.3 ; R6.2@66.64,48.44 R6.2
  Top w0.204: U3.3 63.888,46.58 63.888,47.328 64.296,47.736 66.336,47.736 66.64,48.04 R6.2@66.64,48.44 ; R6.2 66.74,48.76 R7.2 66.985,50.295 C8.1
NetD2_C: D2.C Q1.4 R2.2 R3.1 | length 12.9
  Top w0.18: Q1.4 53.42,39.995 D2.C 54.62,45.74 R2.2 54.62,47.06 55.26,47.7 57.42,47.7 58.41,46.71 R3.1
NetD3_A: D3.A R9.1
  other v1: 37.6,40.86 38.5,40.86 37.6,41.76 38.5,41.76 37.6,42.66 38.5,42.66 36.7,43.56
NetD5_C: D5.C Q5.4 R13.1 R14.2 | length 8.7
  Top w0.18: Q5.4 83.49,24.229 D5.C 83.64,27.506 83.64,28.56 84.838,29.758 R14.2 85.114,29.788 R13.1@85.114,31.084
NetQ1_5,6,7,8,EP: Q1.5 Q1.6 Q1.7 Q1.8 Q1.EP R_M.3
NetQ5_5,6,7,8,EP: Q5.5 Q5.6 Q5.7 Q5.8 Q5.EP R_L.1 | length 24.7
  Top w1.676: R_L.1 74.11,14.56 83.86,14.56 85.86,16.56 85.86,20.624 Q5.EP
NetR4_1: R4.1 R5.2 U3.4 | length 13
  Top w0.16: U3.4@63.808,43.687 U3.4
  Top w0.204: v1(60.42,47.94) 61.23,48.75 R4.1 62.08,49.99 R5.2 ; v1(62.628,42.432) 63.888,42.432 63.888,43.98 U3.4
  Bottom w0.204: v1(60.42,47.94) 60.42,44.64 v1(62.628,42.432)
NetR11_2: R11.2 U3.1 | length 42.8
  Top w0.18: R11.2 36.34,45 39.24,45 39.46,44.78 39.46,38.76
  Top w0.204: 39.46,38.76 51,38.76 51.204,38.9 58.752,38.9 60.996,41.208 62.832,41.208 63.444,41.82 66.54,41.82 66.54,45.084 65.713,45.912 U3.1
NetR12_2: R12.2 U4.1 | length 20
  Top w0.18: v1@78.88,33.304 79.016,33.304 79.02,33.12 80.28,31.86 80.28,30.91 R12.2
  Top w0.203: U4.1 76.094,44.118 77.518,44.118 v1(77.88,44.48)
  Top w0.204: v1@78.88,33.304 v1(78.88,33.584)
  Bottom w0.204: v1(77.88,44.48) 77.88,34.584 v1(78.88,33.584)
NetR15_1: R15.1 R16.2 U4.4 | length 11.2
  Top w0.16: R15.1@68.71,48.75 R15.1 R15.1@68.86,48.8
  Top w0.204: R16.2 68.91,50.04 R15.1 68.91,48.066 68.58,47.736 68.58,43.428 69.324,42.684 70.431,42.684 U4.4
NetR17_2: R17.2 U$14.1 | length 19.2
  Top w0.203: R17.2 74.75,62.23 74.88,62.1 74.88,52.921 75.035,52.766 75.035,51.434 74.88,51.279 74.88,50.86 U$14.1
NetR18_2: R18.2 U$13.1 | length 17.6
  Top w0.203: R18.2 67.099,62.23 67.904,63.035 74.52,63.035 75.286,62.268 75.286,60.534 U$13.1
pads on no net: 2.1mm.2 2.1mm.3 5V.4 5V.6 12V.4 12V.6 IC1.4 IC1.5 IC2.4 IC2.5 Q1.1 Q1.2 Q1.3 Q2.1 Q2.2 Q2.3 Q3.1 Q3.2 Q3.3 Q4.1 Q4.2 Q4.3 Q5.1 Q5.2 Q5.3 R_L.2 R_M.2 U$3.P$3 U$3.P$4 U$8.P$3 U$8.P$4 U$9.P$3 U$9.P$4 U$10.P$3 U$10.P$4 U$13.P$4 U$13.P$5 U$13.P$6 U$13.P$7 U$14.P$4 U$14.P$5 U$14.P$6 U$14.P$7
copper on no net: | length 1.1
  Top w0.16: 85.709,23.82 86.626,24.435

## Polygon pours and split planes (outlines as drawn)
LP_N on Bottom "Polygon_1_Net_LP_N" (solid, remove dead copper, shelved, pour order 11): 89.04,22.64 76.34,22.64 76.34,31.55 75.08,32.99 75.08,39.68 58.3,39.68 58.32,11.68 58.32,0.56 89.04,0.56
BAT+ on Bottom "Polygon_1_Net_BAT+" (solid, remove dead copper, shelved, pour order 12): 30.297,79.703 85.203,79.703 85.203,63.297 46.203,63.297 46.203,49.797 30.297,49.797
BAT- on Bottom "Polygon_6_Net_BAT-" (solid, remove dead copper, shelved, pour order 14): 69.998,42.8 89.04,42.8 89.04,22.96 76.839,22.96 76.959,31.6 70.302,31.6
BAT- on Bottom "Polygon_2_Net_BAT-" (solid, remove dead copper, shelved, pour order 6): 47.28,62.8 59.2,62.8 59.2,39.28 28.24,39.28 28.24,49.2 47.28,49.2
BAT- on Bottom "Polygon_1_Net_BAT-" (solid, remove dead copper, shelved, pour order 10): 60.4,62.64 89.361,62.64 89.019,40.02 60.42,40.02
NetQ1_5,6,7,8,EP on Top "Polygon_1_Net_N$1" (solid, remove dead copper, shelved, pour order 5): 46.417,38.903 58.523,38.903 58.523,30.217 46.417,30.217
NetQ5_5,6,7,8,EP on Top "Polygon_1_Net_N$13" (solid, remove dead copper, shelved, pour order 4): 84.15,22.59 88.65,22.59 88.65,13.77 84.15,13.77
LP_N on Top "Polygon_3_Net_LP_N" (solid, remove dead copper, shelved, pour order 2): 77.49,22.59 82.89,22.59 82.89,17.01 77.49,17.01
LP_N on Top "Polygon_2_Net_LP_N" (solid, remove dead copper, shelved, pour order 9): 62.8,11.28 72.4,11.28 72.4,1.04 62.8,1.04
M- on Top "Polygon_1_Net_M-" (solid, remove dead copper, shelved, pour order 13): 50.913,38.16 51.28,37.793 51.28,25.087 50.753,24.56 8.127,24.56 6.8,25.887 6.8,47.553 26.16,66.913 26.16,78.113 27.647,79.6 83.393,79.6 85.2,77.793 85.2,65.247 83.233,63.28 52.515,63.28 35.615,45.3 28.818,45.201 28.642,38.08
BAT- on Top "Polygon_8_Net_BAT-" (solid, remove dead copper, shelved, pour order 8): 88.916,23.28 84.7,23.28 84.7,28.56 88.916,28.56
BAT- on Top "Polygon_7_Net_BAT-" (solid, remove dead copper, shelved, pour order 7): 78.9,23.12 82.74,23.12 82.74,28.56 78.9,28.56
BAT- on Top "Polygon_5_Net_BAT-" (solid, remove dead copper, shelved, pour order 0): 39.42,38.32 39.42,44.82 35.2,44.82 35.2,38.32
BAT- on Top "Polygon_4_Net_BAT-" (solid, remove dead copper, shelved, pour order 3): 29.04,38.16 29.04,44.84 34.14,44.84 34.14,38.16
BAT- on Top "Polygon_3_Net_BAT-" (solid, remove dead copper, shelved, pour order 1): 53.96,39.22 53.96,44.82 58.86,44.82 58.86,39.22

## Keep-outs
Keep-Out Layer:
  the board outline again, w0

## Silkscreen, mask and mechanical layers (free items; w line width, h text height)
Top Overlay:
  text "-" at 18.88,67.04 h2.76
  text "+" at 25.92,66.72 h2.76
  text "-" at 7.91,66.7 h1.51
  text "+" at 15.43,66.52 h1.51
  text "5v" at 21.44,64.64 h2.76
  text "12v" at 10.08,63.04 h2.76
  text "PSU V3.0" at 9.53,55.634 h1.51
  text "10/2018" at 9.53,52.967 h1.51
  text "Ben Katz" at 9.53,50.3 h1.51
Dimension:
  the board outline again, w0
Unrouted:
  lines w0: 5.66,26.72 5.76,24.58 ; 9.83,16.06 9.83,16.89 ; 65.4,51.2 65.44,51.088

## Text inside footprints (layer, text, board x,y; h text height)
2.1mm: Top Overlay "RefDes" at 6.41,56.525 h1.27 r270; Top Overlay "REFDES" at 6.41,56.842 h1.27 r270; Top 3D Body "RefDes2" at 6.41,56.842 h1.27 r270
U3: tDocu "*" at 65.217,46.448 h1.97 r270
U4: tDocu "*" at 73.217,46.448 h1.97 r270